# Altium PCB TSAL.PcbDoc
Units mil, origin at the board's own origin, x right, y up, seen from the top; angles counter-clockwise.
Board outline 3650 x 890 mil, 2 copper layers (Top Layer, Bottom Layer), stack 61.8 mil thick; 105 components, 90 nets, 222 pads, 19 vias.
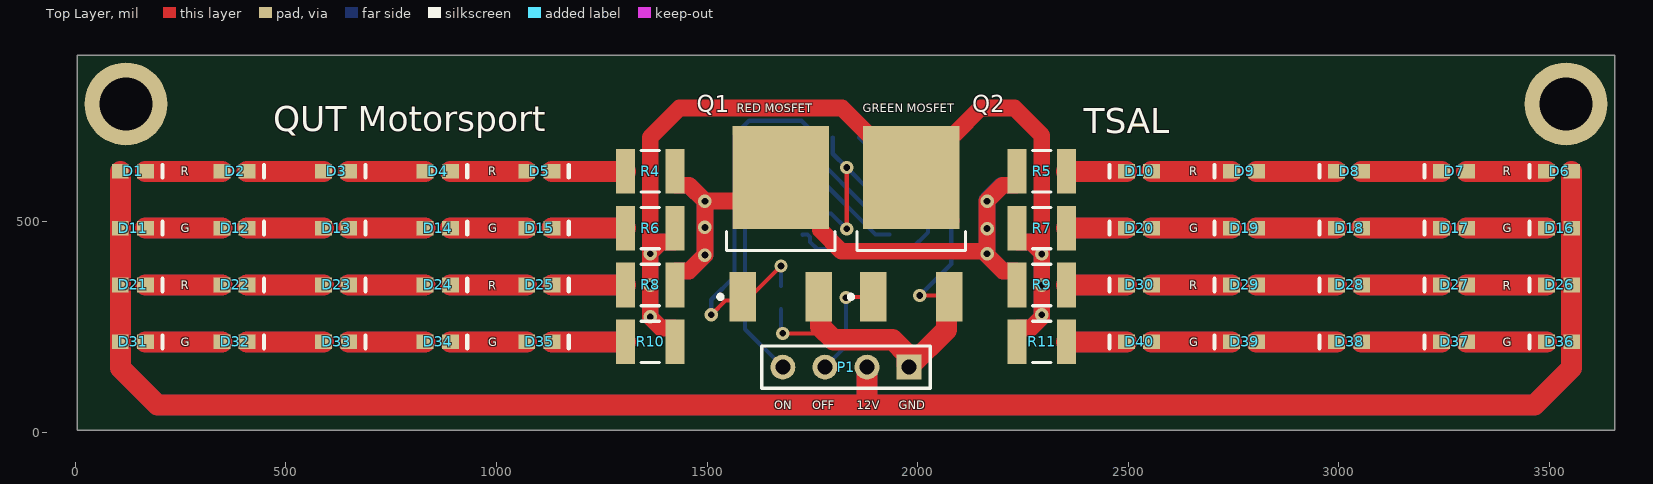
[diagram p0: Top Layer view]
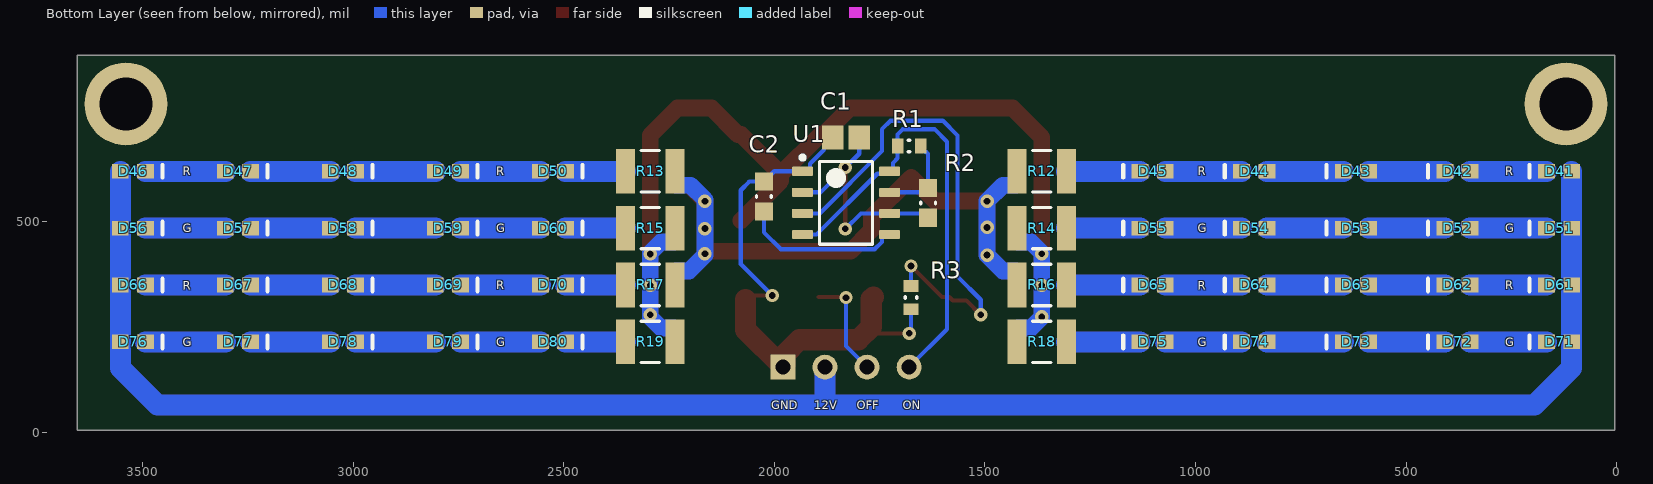
[diagram p1: Bottom Layer view, seen from below]

## Layer stack, top to bottom
Top Solder: solder mask 0.4, Solder Resist, Dk 3.5
Top Layer: signal copper 1.4
Dielectric 1: core 59, Core-043, Dk 4.3
Bottom Layer: signal copper 1.4
Bottom Solder: solder mask 0.4, Solder Resist, Dk 3.5

## Board outline
5,5 3655,5 3655,895 5,895

## Design rules (kind name [scope] priority, off if disabled: settings)
Clearance [All] p1: gap=10 ignorepadtopadclearanceinfootprint=FALSE except(0: Arc-Hole Track-Hole SMDPad-Hole THPad-Hole Via-Hole Fill-Hole Poly-Hole Region-Hole Text-Hole)
PolygonConnect [All] p1: connectstyle=Relief reliefconductorwidth=10 reliefentries=4 polygonreliefangle="90 Angle" airgapwidth=10
RoutingVias [All] p1: holewidth=15.75 width=31.5 viastyle="Through Hole" minholewidth=15.75 minwidth=31.5 maxholewidth=15.75 maxwidth=31.5
SolderMaskExpansion [All] p1: expansion=4 istentingtop=FALSE
Width [All] p1: maxlimit=50 minlimit=10 preferedwidth=10 minimp=50.000000 maximp=50.000000 favimp=50.000000
30 further rules are at their usual default settings.

## Classes and differential pairs
component class LEDs: D1 D2 D3 D4 D5 D6 D7 D8 D9 D10 D11 D12 D13 D14 D15 D16 D17 D18 D19 D20 D21 D22 D23 D24 D25 D26 D27 D28 D29 D30 D31 D32 D33 D34 D35 D36 D37 D38 D39 D40 D41 D42 D43 D44 D45 D46 D47 D48 D49 D50 D51 D52 D53 D54 D55 D56 D57 D58 D59 D60 D61 D62 D63 D64 D65 D66 D67 D68 D69 D70 D71 D72 D73 D74 D75 D76 D77 D78 D79 D80 R4 R5 R6 R7 R8 R9 R10 R11 R12 R13 R14 R15 R16 R17 R18 R19
component class Control: C1 C2 P1 Q1 Q2 R1 R2 R3 U1

## Components (designator, comment, footprint, x,y, rotation, side; value= is the part's Value field where it differs from the comment)
C1 "C0805C475M3PACTU" CAPC2013X145X50NL20T25 1830,700 r180 bottom
C2 "CAP 10nF 25V 0603(1608)" CAPC0603(1608)100_M 2025,560 r270 bottom value=10nF
D1 "Red LED" LED-0603 136.65,620 r0 top
D2 "Red LED" LED-0603 377.92,620 r0 top
D3 "Red LED" LED-0603 619.19,620 r0 top
D4 "Red LED" LED-0603 860.46,620 r0 top
D5 "Red LED" LED-0603 1101.73,620 r0 top
D6 "Red LED" LED-0603 3523.35,620 r180 top
D7 "Red LED" LED-0603 3273.98,620 r180 top
D8 "Red LED" LED-0603 3024.61,620 r180 top
D9 "Red LED" LED-0603 2775.24,620 r180 top
D10 "Red LED" LED-0603 2525.87,620 r180 top
D11 "Green LED" LED-0603 136.65,485 r0 top
D12 "Green LED" LED-0603 377.92,485 r0 top
D13 "Green LED" LED-0603 619.19,485 r0 top
D14 "Green LED" LED-0603 860.46,485 r0 top
D15 "Green LED" LED-0603 1101.73,485 r0 top
D16 "Green LED" LED-0603 3523.35,485 r180 top
D17 "Green LED" LED-0603 3273.98,485 r180 top
D18 "Green LED" LED-0603 3024.61,485 r180 top
D19 "Green LED" LED-0603 2775.24,485 r180 top
D20 "Green LED" LED-0603 2525.87,485 r180 top
D21 "Red LED" LED-0603 136.65,350 r0 top
D22 "Red LED" LED-0603 377.92,350 r0 top
D23 "Red LED" LED-0603 619.19,350 r0 top
D24 "Red LED" LED-0603 860.46,350 r0 top
D25 "Red LED" LED-0603 1101.73,350 r0 top
D26 "Red LED" LED-0603 3523.35,350 r180 top
D27 "Red LED" LED-0603 3273.98,350 r180 top
D28 "Red LED" LED-0603 3024.61,350 r180 top
D29 "Red LED" LED-0603 2775.24,350 r180 top
D30 "Red LED" LED-0603 2525.87,350 r180 top
D31 "Green LED" LED-0603 136.65,215 r0 top
D32 "Green LED" LED-0603 377.92,215 r0 top
D33 "Green LED" LED-0603 619.19,215 r0 top
D34 "Green LED" LED-0603 860.46,215 r0 top
D35 "Green LED" LED-0603 1101.73,215 r0 top
D36 "Green LED" LED-0603 3523.35,215 r180 top
D37 "Green LED" LED-0603 3273.98,215 r180 top
D38 "Green LED" LED-0603 3024.61,215 r180 top
D39 "Green LED" LED-0603 2775.24,215 r180 top
D40 "Green LED" LED-0603 2525.87,215 r180 top
D41 "Red LED" LED-0603 136.65,620 r0 bottom
D42 "Red LED" LED-0603 377.92,620 r0 bottom
D43 "Red LED" LED-0603 619.19,620 r0 bottom
D44 "Red LED" LED-0603 860.46,620 r0 bottom
D45 "Red LED" LED-0603 1101.73,620 r0 bottom
D46 "Red LED" LED-0603 3523.35,620 r180 bottom
D47 "Red LED" LED-0603 3273.98,620 r180 bottom
D48 "Red LED" LED-0603 3024.61,620 r180 bottom
D49 "Red LED" LED-0603 2775.24,620 r180 bottom
D50 "Red LED" LED-0603 2525.87,620 r180 bottom
D51 "Green LED" LED-0603 136.65,485 r0 bottom
D52 "Green LED" LED-0603 377.92,485 r0 bottom
D53 "Green LED" LED-0603 619.19,485 r0 bottom
D54 "Green LED" LED-0603 860.46,485 r0 bottom
D55 "Green LED" LED-0603 1101.73,485 r0 bottom
D56 "Green LED" LED-0603 3523.35,485 r180 bottom
D57 "Green LED" LED-0603 3273.98,485 r180 bottom
D58 "Green LED" LED-0603 3024.61,485 r180 bottom
D59 "Green LED" LED-0603 2775.24,485 r180 bottom
D60 "Green LED" LED-0603 2525.87,485 r180 bottom
D61 "Red LED" LED-0603 136.65,350 r0 bottom
D62 "Red LED" LED-0603 377.92,350 r0 bottom
D63 "Red LED" LED-0603 619.19,350 r0 bottom
D64 "Red LED" LED-0603 860.46,350 r0 bottom
D65 "Red LED" LED-0603 1101.73,350 r0 bottom
D66 "Red LED" LED-0603 3523.35,350 r180 bottom
D67 "Red LED" LED-0603 3273.98,350 r180 bottom
D68 "Red LED" LED-0603 3024.61,350 r180 bottom
D69 "Red LED" LED-0603 2775.24,350 r180 bottom
D70 "Red LED" LED-0603 2525.87,350 r180 bottom
D71 "Green LED" LED-0603 136.65,215 r0 bottom
D72 "Green LED" LED-0603 377.92,215 r0 bottom
D73 "Green LED" LED-0603 619.19,215 r0 bottom
D74 "Green LED" LED-0603 860.46,215 r0 bottom
D75 "Green LED" LED-0603 1101.73,215 r0 bottom
D76 "Green LED" LED-0603 3523.35,215 r180 bottom
D77 "Green LED" LED-0603 3273.98,215 r180 bottom
D78 "Green LED" LED-0603 3024.61,215 r180 bottom
D79 "Green LED" LED-0603 2775.24,215 r180 bottom
D80 "Green LED" LED-0603 2525.87,215 r180 bottom
P1 "Header 4" HDR1X4 1980,155 r180 top
Q1 "NTD4860NT4G" ONSC-DPAK-3-369AA-01_V 1675,495 r90 top
Q2 "NTD4860NT4G" ONSC-DPAK-3-369AA-01_V 1985,495 r90 top
R1 "1K 5% 0603(1608)" RESC0603(1608)_L 1680,680 r0 bottom value="1000.00 Ohm"
R2 "51K 5% 0603(1608)" RESC0603(1608)_M 1635,545 r90 bottom value="51000.00 Ohm"
R3 "1K 5% 0603(1608)" RESC0603(1608)_L 1675.58,320 r90 bottom value="1000.00 Ohm"
R4 "100R 5% 1210(3225)" RESC1210(3225)_N 1365,620 r180 top value="100.00 Ohm"
R5 "100R 5% 1210(3225)" RESC1210(3225)_N 2295,620 r0 top value="100.00 Ohm"
R6 "75R 5% 1210(3225)" RESC1210(3225)_N 1365,485 r180 top value="75.00 Ohm"
R7 "75R 5% 1210(3225)" RESC1210(3225)_N 2295,485 r0 top value="75.00 Ohm"
R8 "100R 5% 1210(3225)" RESC1210(3225)_N 1365,350 r180 top value="100.00 Ohm"
R9 "100R 5% 1210(3225)" RESC1210(3225)_N 2295,350 r0 top value="100.00 Ohm"
R10 "75R 5% 1210(3225)" RESC1210(3225)_N 1365,215 r180 top value="75.00 Ohm"
R11 "75R 5% 1210(3225)" RESC1210(3225)_N 2295,215 r0 top value="75.00 Ohm"
R12 "100R 5% 1210(3225)" RESC1210(3225)_N 1365,620 r180 bottom value="100.00 Ohm"
R13 "100R 5% 1210(3225)" RESC1210(3225)_N 2295,620 r0 bottom value="100.00 Ohm"
R14 "75R 5% 1210(3225)" RESC1210(3225)_N 1365,485 r180 bottom value="75.00 Ohm"
R15 "75R 5% 1210(3225)" RESC1210(3225)_N 2295,485 r0 bottom value="75.00 Ohm"
R16 "100R 5% 1210(3225)" RESC1210(3225)_N 1365,350 r180 bottom value="100.00 Ohm"
R17 "100R 5% 1210(3225)" RESC1210(3225)_N 2295,350 r0 bottom value="100.00 Ohm"
R18 "75R 5% 1210(3225)" RESC1210(3225)_N 1365,215 r180 bottom value="75.00 Ohm"
R19 "75R 5% 1210(3225)" RESC1210(3225)_N 2295,215 r0 bottom value="75.00 Ohm"
U1 "LMC555CM/NOPB" D0008A_L 1830,545 r180 bottom

## Footprints (in the part's own frame and the unit in brackets; to place one, negate y for a bottom-side part, rotate by r counter-clockwise, add the part's x,y. Pads: shape width x height; smd on the part's side, far side on the other; paste and mask are expansions set on the pad)
CAPC0603(1608)100_M [mm] "Chip Capacitor, Body 1.6x0.8mm, Height 1.0mm, IPC Low Density"
  rect 1.1x1.1 smd: 1(-0.9,0) 2(0.9,0)
  silkscreen extent -0.05,-0.45 0.05,0.45, body extent -0.87,-0.47 0.88,0.48, height 1
CAPC2013X145X50NL20T25 [mm] "Chip Capacitor, 2-Leads, Body 2.00x1.25mm, IPC Medium Density"
  rect 1.3x1.45 smd: 1(-0.8,0) 2(0.8,0)
  body extent -1.1,-0.72 1.1,0.72, height 1.45
D0008A_L [mm] "SOIC, 8-Leads, Body 5x4mm, Pitch 1.27mm, IPC High Density"
  rrect18% 1.25x0.55 smd: 1(-2.625,1.905) 2(-2.625,0.635) 3(-2.625,-0.635) 4(-2.625,-1.905) 5(2.625,-1.905) 6(2.625,-0.635) 7(2.625,0.635) 8(2.625,1.905)
  silkscreen extent -2.75,-2.5 1.6,2.85, body extent -3,-2.45 3,2.45, height 1.63
HDR1X4 [mm] "Connector; Header; 4 Position"
  rect 1.5x1.5 hole 0.9: 1(0,0)
  round 1.5 hole 0.9: 2(2.54,0) 3(5.08,0) 4(7.62,0)
  silkscreen extent -1.27,-1.27 8.89,1.27
LED-0603 [mil]
  rect 40x35 smd: 1(-30,0) 2(30,0)
  silkscreen extent 70,-15 70,15, body extent -45,-18 45,18, height 20
ONSC-DPAK-3-369AA-01_V [mm] "DPAK, 3-Leads, Body 6.54x6.095mm, Pitch 2.29mm"
  rect 3x1.6 smd: 1(-4.4,2.29) 3(-4.4,-2.29)
  rect 6.2x5.8 smd: 4(2.8,0)
  silkscreen extent -4.52,-3.27 -0.45,3.76, body extent -1.6,-3.27 4.49,3.27, height 2.47
RESC0603(1608)_L [mm] "Chip Resistor, Body 1.6x0.8mm, IPC High Density"
  rect 0.7x0.9 smd: 1(-0.7,0) 2(0.7,0)
  silkscreen extent -0.05,-0.35 0.05,0.35, body extent -0.85,-0.47 0.85,0.47, height 0.6
RESC0603(1608)_M [mm] "Chip Resistor, Body 1.6x0.8mm, IPC Low Density"
  rect 1.1x1.1 smd: 1(-0.9,0) 2(0.9,0)
  silkscreen extent -0.05,-0.45 0.05,0.45, body extent -0.85,-0.47 0.85,0.47, height 0.6
RESC1210(3225)_N [mm] "Chip Resistor, Body 3.2x2.5mm, IPC Medium Density"
  rect 1.15x2.7 smd: 1(-1.5,0) 2(1.5,0)
  silkscreen extent -0.55,-1.25 0.55,1.25, body extent -1.7,-1.35 1.7,1.35, height 0.71

## Part data
C1: library part CMP-2007-01014-1, Manufacturer=Kemet, Part Number=C0805C475M3PACTU
C2: library part CMP-1035-02316-1, "CAP 10nF 25V ±5% 0603 (1608 Metric) Thickness 1mm SMD", Case-EIA=0603, Case-Metric=1608, Rated Voltage="25 V", Tolerance=Â±5%, Max Thickness="1 mm", Technology=SMT
D1 D2 D3 D4 D5 D6 D7 D8 D9 D10 D21 D22 D23 D24 D25 D26 D27 D28 D29 D30 D41 D42 D43 D44 D45 D46 D47 D48 D49 D50 D61 D62 D63 D64 D65 D66 D67 D68 D69 D70: library part LEDRed
D11 D12 D13 D14 D15 D16 D17 D18 D19 D20 D31 D32 D33 D34 D35 D36 D37 D38 D39 D40 D51 D52 D53 D54 D55 D56 D57 D58 D59 D60 D71 D72 D73 D74 D75 D76 D77 D78 D79 D80: library part LEDGreen
P1: "Header, 4-Pin", LatestRevisionDate=17-Jul-2002, LatestRevisionNote="Re-released for DXP Platform.", Publisher="Altium Limited"
Q1 Q2: library part CMP-1058-00321-1, "Power MOSFET, 25 V, 65 A, Single N-Channel, 3-Pin DPAK, Pb-Free, Tape and Reel", Manufacturer="On Semiconductor", Package Type=DPAK-3, Channel Polarity="N Channel", Ciss Typ (pF)=1308, ComponentLink1Description="Manufacturer URL", ComponentLink1URL=http://www.onsemi.com/, ComponentLink2Description=Datasheet, ComponentLink2URL=http://www.onsemi.cn/pub_link/Collateral/NTD4860N.PDF, ComponentLink3Description="Package Specification", ComponentLink3URL=http://www.onsemi.cn/pub_link/Collateral/369AA.PDF, Configuration=Single, Coss Typ (pF)=342, Crss Typ (pF)=169, DatasheetVersion="Rev. 1", ID Max (A)=65, Mounting Technology="Surface Mount", PackageDescription="3-Pin Flange Mount, Body 6.54 x 6.095 mm, Pitch 2.29 mm", PackageReference=DPAK-3-369AA-01, PackageVersion="Rev. B, 06/2010", Packing="Tape and Reel", PartNumber=NTD4860NT4G, Qrr Typ (nC)=3.5, RoHS=Pb-Free, V(BR)DSS Min (V)=25, VGS(th) Max (V)=2.5, VGS Max (V)=20
R1 R3: library part CMP-1012-00074-1, "1K 0.1W 5% 0603 (1608 Metric)  SMD", Case-EIA=0603, Case-Metric=1608, Power="0.1 W", Tolerance="5 %", Technology=SMT
R2: library part CMP-1012-00115-1, "51K 0.1W 5% 0603 (1608 Metric)  SMD", Case-EIA=0603, Case-Metric=1608, Power="0.1 W", Tolerance="5 %", Technology=SMT
R4 R5 R8 R9 R12 R13 R16 R17: library part CMP-1015-00050-1, "100R 0.5W 5% 1210 (3225 Metric)  SMD", Case-EIA=1210, Case-Metric=3225, Power="0.5 W", Tolerance="5 %", Technology=SMT
R6 R7 R10 R11 R14 R15 R18 R19: library part CMP-1015-00047-1, "75R 0.5W 5% 1210 (3225 Metric)  SMD", Case-EIA=1210, Case-Metric=3225, Power="0.5 W", Tolerance="5 %", Technology=SMT
U1: library part CMP-0056-00124-3, "CMOS Timer, 8-pin Narrow SOIC, Pb-Free", Manufacturer="Texas Instruments", PackageTopMarking=NSZXTT*LMC*555CM, PowerWise=N, Code_IPC=SOIC127P600-8, Code_JEDEC=MS-012-AA, ComponentLink1Description="Datasheet URL", ComponentLink1URL=http://www.ti.com/general/docs/lit/getliterature.tsp?genericPartNumber=LMC555&fileType=pdf, CompType="Analog IC", PackageDescription="SOIC Narrow, 4.9 x 3.9 x 1.45mm, 8 Lead, 1.27mm Pitch", PackageReference=D0008A, PinCount=8, RoHS=Y

## Free pads (board coordinates)
  round 196.85 hole 125.98 unplated: M3(120,780) M3(3540,780)

## Via types
v1: diameter 32, hole 16, Top Layer to Bottom Layer, 12 vias
v2: diameter 31.5, hole 15.75, Top Layer to Bottom Layer, 7 vias

## Nets (pads, with @x,y where several pads share a name; then routed paths per layer and width w, separated by ;. In a path a pad name is that pad's centre, name@x,y a point inside that pad or via, vN(x,y) a via of type N, cw(c..) or ccw(c..) an arc to the next point about the centre after c; other vN are vias at no path point)
+12: D1.1 D6.1 D11.1 D16.1 D21.1 D26.1 D31.1 D36.1 D41.1 D46.1 D51.1 D56.1 D61.1 D66.1 D71.1 D76.1 P1.2 | length 9086.4
  Top Layer w50: D1.1 D11.1 D21.1 D31.1 106.65,153.35 195,65 1880,65 ; P1.2 1880,80 1880,65 ; D6.1 D16.1 D26.1 D36.1 3553.35,153.35 3465,65 1880,65
  Bottom Layer w50: D41.1 D51.1 D61.1 D71.1 106.65,153.35 195,65 1880,65 ; P1.2 1880,65 ; D46.1 D56.1 D66.1 D76.1 3553.35,153.35 3465,65 1880,65
GND: C1.1 C2.1 P1.1 Q1.3 Q2.3 R3.1 U1.1 | length 1321.1
  Top Layer w10: v2(1680,235) 1755,235 1770,250 ; v2(2005,325) 2058.94,325 Q2.3@2068.66,315.28
  Top Layer w50: Q1.3 1770,316.93 1770,250 1800,220 1940,220 1975.47,184.53 1975.47,159.53 P1.1 2068.66,243.66 Q2.3@2068.66,315.28
  Bottom Layer w10: R3.1 1675.58,239.42 v2(1680,235) ; C1.1 1882.09,679.41 1882.09,671.26 1915.59,637.75 1915.59,625.83 1921.42,620 U1.1 2000.43,620 C2.1 2059.57,595.43 2080,575 2080,400 v2(2005,325)
GREEN_LEDS: Q2.4 R6.1 R7.1 R10.1 R11.1 R14.1 R15.1 R18.1 R19.1 | length 3236.6
  Top Layer w40: R10.1 1424.06,245.51 1421.42,248.15 1390.91,248.15 v1(1365,274.09) v1@1365,425.94 ; R6.1 1424.06,454.49 1421.42,451.85 1390.91,451.85 v1@1365,425.94 ; Q2.4@2079.17,503.19 1985,597.36 Q2.4 Q2.4@1985,613.11 ; R11.1 2235.94,245.51 2238.58,248.15 2269.09,248.15 2295,274.06 v1@2295,425.94 ; R7.1 2235.94,454.49 2238.58,451.85 2269.09,451.85 v1@2295,425.94 ; v1@1365,425.94 1365,700 1435,770 1820.24,770 1882.95,707.28 1890.83,707.28 Q2.4@1985,613.11 ; Q2.4@1985,613.11 2079.17,707.28 2087.05,707.28 2149.76,770 2230,770 2295,705 v1@2295,425.94
  Bottom Layer w40: R18.1 1424.06,245.51 1421.42,248.15 1390.91,248.15 v1(1365,274.09) 1365,425.94 1390.91,451.85 1421.42,451.85 1424.06,454.49 R14.1 ; R19.1 2235.94,245.51 2238.58,248.15 2269.09,248.15 2295,274.06 2295,425.94 2269.09,451.85 2238.58,451.85 2235.94,454.49 R15.1
  other v1: 2295,279.09 1365,349.09 2295,349.09 1365,424.09 2295,423.58
HV_ACTIVE: P1.4 R1.2 U1.4 U1.8 | length 1072.9
  Bottom Layer w10: P1.4 1590,245 1590,690 1620,720 1695,720 1707.56,707.44 R1.2 1707.56,651.02 1718.61,639.97 1718.61,625.83 1724.44,620 U1.8 1740.43,620 1746.26,614.17 1755.83,614.17 1900,470 U1.4
HV_INACTIVE: P1.3 Q2.1 | length 251.3
  Top Layer w10: v2(1830,320) 1831.77,321.77 Q2.1
  Bottom Layer w10: P1.3 1830,205 v2(1830,320)
NetC1_2: C1.2 R2.1 U1.2 U1.6 | length 581.3
  Top Layer w10: v2(1831.77,483.15) v2(1831.77,629.06)
  Bottom Layer w10: R2.1 1645.43,520 U1.6 1794.09,520 v2(1831.77,483.15) ; C1.2 1798.5,661.5 v2(1831.77,629.06) 1890.83,570 U1.2 U1.2@1939.17,564.17
NetC2_2: C2.2 U1.5 | length 387
  Bottom Layer w10: U1.5@1727.4,469.25 U1.5 1738.58,470 1744.41,464.17 1744.41,452.25 1761.65,435 1985,435 2025,475 C2.2
NetD1_2: D1.2 D2.1 | length 181.3
  Top Layer w50: D1.2 D2.1
NetD2_2: D2.2 D3.1 | length 181.3
  Top Layer w50: D2.2 D3.1
NetD3_2: D3.2 D4.1 | length 181.3
  Top Layer w50: D3.2 D4.1
NetD4_2: D4.2 D5.1 | length 181.3
  Top Layer w50: D4.2 D5.1
NetD5_2: D5.2 R4.2 | length 174.2
  Top Layer w50: D5.2 R4.2
NetD6_2: D6.2 D7.1 | length 189.4
  Top Layer w50: D7.1 D6.2
NetD7_2: D7.2 D8.1 | length 189.4
  Top Layer w50: D8.1 D7.2
NetD8_2: D8.2 D9.1 | length 189.4
  Top Layer w50: D9.1 D8.2
NetD9_2: D9.2 D10.1 | length 189.4
  Top Layer w50: D10.1 D9.2
NetD10_2: D10.2 R5.2 | length 141.8
  Top Layer w50: R5.2 D10.2
NetD11_2: D11.2 D12.1 | length 181.3
  Top Layer w50: D11.2 D12.1
NetD12_2: D12.2 D13.1 | length 181.3
  Top Layer w50: D12.2 D13.1
NetD13_2: D13.2 D14.1 | length 181.3
  Top Layer w50: D13.2 D14.1
NetD14_2: D14.2 D15.1 | length 181.3
  Top Layer w50: D14.2 D15.1
NetD15_2: D15.2 R6.2 | length 174.2
  Top Layer w50: D15.2 R6.2
NetD16_2: D16.2 D17.1 | length 189.4
  Top Layer w50: D17.1 D16.2
NetD17_2: D17.2 D18.1 | length 189.4
  Top Layer w50: D18.1 D17.2
NetD18_2: D18.2 D19.1 | length 189.4
  Top Layer w50: D19.1 D18.2
NetD19_2: D19.2 D20.1 | length 189.4
  Top Layer w50: D20.1 D19.2
NetD20_2: D20.2 R7.2 | length 141.8
  Top Layer w50: R7.2 D20.2
NetD21_2: D21.2 D22.1 | length 181.3
  Top Layer w50: D21.2 D22.1
NetD22_2: D22.2 D23.1 | length 181.3
  Top Layer w50: D22.2 D23.1
NetD23_2: D23.2 D24.1 | length 181.3
  Top Layer w50: D23.2 D24.1
NetD24_2: D24.2 D25.1 | length 181.3
  Top Layer w50: D24.2 D25.1
NetD25_2: D25.2 R8.2 | length 174.2
  Top Layer w50: D25.2 R8.2
NetD26_2: D26.2 D27.1 | length 189.4
  Top Layer w50: D27.1 D26.2
NetD27_2: D27.2 D28.1 | length 189.4
  Top Layer w50: D28.1 D27.2
NetD28_2: D28.2 D29.1 | length 189.4
  Top Layer w50: D29.1 D28.2
NetD29_2: D29.2 D30.1 | length 189.4
  Top Layer w50: D30.1 D29.2
NetD30_2: D30.2 R9.2 | length 141.8
  Top Layer w50: R9.2 D30.2
NetD31_2: D31.2 D32.1 | length 181.3
  Top Layer w50: D31.2 D32.1
NetD32_2: D32.2 D33.1 | length 181.3
  Top Layer w50: D32.2 D33.1
NetD33_2: D33.2 D34.1 | length 181.3
  Top Layer w50: D33.2 D34.1
NetD34_2: D34.2 D35.1 | length 181.3
  Top Layer w50: D34.2 D35.1
NetD35_2: D35.2 R10.2 | length 174.2
  Top Layer w50: D35.2 R10.2
NetD36_2: D36.2 D37.1 | length 189.4
  Top Layer w50: D37.1 D36.2
NetD37_2: D37.2 D38.1 | length 189.4
  Top Layer w50: D38.1 D37.2
NetD38_2: D38.2 D39.1 | length 189.4
  Top Layer w50: D39.1 D38.2
NetD39_2: D39.2 D40.1 | length 189.4
  Top Layer w50: D40.1 D39.2
NetD40_2: D40.2 R11.2 | length 141.8
  Top Layer w50: R11.2 D40.2
NetD41_2: D41.2 D42.1 | length 181.3
  Bottom Layer w50: D41.2 D42.1
NetD42_2: D42.2 D43.1 | length 181.3
  Bottom Layer w50: D42.2 D43.1
NetD43_2: D43.2 D44.1 | length 181.3
  Bottom Layer w50: D43.2 D44.1
NetD44_2: D44.2 D45.1 | length 181.3
  Bottom Layer w50: D44.2 D45.1
NetD45_2: D45.2 R12.2 | length 174.2
  Bottom Layer w50: D45.2 R12.2
NetD46_2: D46.2 D47.1 | length 189.4
  Bottom Layer w50: D47.1 D46.2
NetD47_2: D47.2 D48.1 | length 189.4
  Bottom Layer w50: D48.1 D47.2
NetD48_2: D48.2 D49.1 | length 189.4
  Bottom Layer w50: D49.1 D48.2
NetD49_2: D49.2 D50.1 | length 189.4
  Bottom Layer w50: D50.1 D49.2
NetD50_2: D50.2 R13.2 | length 141.8
  Bottom Layer w50: R13.2 D50.2
NetD51_2: D51.2 D52.1 | length 181.3
  Bottom Layer w50: D51.2 D52.1
NetD52_2: D52.2 D53.1 | length 181.3
  Bottom Layer w50: D52.2 D53.1
NetD53_2: D53.2 D54.1 | length 181.3
  Bottom Layer w50: D53.2 D54.1
NetD54_2: D54.2 D55.1 | length 181.3
  Bottom Layer w50: D54.2 D55.1
NetD55_2: D55.2 R14.2 | length 174.2
  Bottom Layer w50: D55.2 R14.2
NetD56_2: D56.2 D57.1 | length 189.4
  Bottom Layer w50: D57.1 D56.2
NetD57_2: D57.2 D58.1 | length 189.4
  Bottom Layer w50: D58.1 D57.2
NetD58_2: D58.2 D59.1 | length 189.4
  Bottom Layer w50: D59.1 D58.2
NetD59_2: D59.2 D60.1 | length 189.4
  Bottom Layer w50: D60.1 D59.2
NetD60_2: D60.2 R15.2 | length 141.8
  Bottom Layer w50: R15.2 D60.2
NetD61_2: D61.2 D62.1 | length 181.3
  Bottom Layer w50: D61.2 D62.1
NetD62_2: D62.2 D63.1 | length 181.3
  Bottom Layer w50: D62.2 D63.1
NetD63_2: D63.2 D64.1 | length 181.3
  Bottom Layer w50: D63.2 D64.1
NetD64_2: D64.2 D65.1 | length 181.3
  Bottom Layer w50: D64.2 D65.1
NetD65_2: D65.2 R16.2 | length 174.2
  Bottom Layer w50: D65.2 R16.2
NetD66_2: D66.2 D67.1 | length 189.4
  Bottom Layer w50: D67.1 D66.2
NetD67_2: D67.2 D68.1 | length 189.4
  Bottom Layer w50: D68.1 D67.2
NetD68_2: D68.2 D69.1 | length 189.4
  Bottom Layer w50: D69.1 D68.2
NetD69_2: D69.2 D70.1 | length 189.4
  Bottom Layer w50: D70.1 D69.2
NetD70_2: D70.2 R17.2 | length 141.8
  Bottom Layer w50: R17.2 D70.2
NetD71_2: D71.2 D72.1 | length 181.3
  Bottom Layer w50: D71.2 D72.1
NetD72_2: D72.2 D73.1 | length 181.3
  Bottom Layer w50: D72.2 D73.1
NetD73_2: D73.2 D74.1 | length 181.3
  Bottom Layer w50: D73.2 D74.1
NetD74_2: D74.2 D75.1 | length 181.3
  Bottom Layer w50: D74.2 D75.1
NetD75_2: D75.2 R18.2 | length 174.2
  Bottom Layer w50: D75.2 R18.2
NetD76_2: D76.2 D77.1 | length 189.4
  Bottom Layer w50: D77.1 D76.2
NetD77_2: D77.2 D78.1 | length 189.4
  Bottom Layer w50: D78.1 D77.2
NetD78_2: D78.2 D79.1 | length 189.4
  Bottom Layer w50: D79.1 D78.2
NetD79_2: D79.2 D80.1 | length 189.4
  Bottom Layer w50: D80.1 D79.2
NetD80_2: D80.2 R19.2 | length 141.8
  Bottom Layer w50: R19.2 D80.2
RED_LED_CONTROL: Q1.1 R3.2 U1.3 | length 1214.2
  Top Layer w10: v2(1510,279.09) 1544.2,313.3 1576.37,313.3 Q1.1 1602.35,321.77 v2(1675.58,395)
  Bottom Layer w10: v2(1510,279.09) 1510,315 1565,370 1565,705 1600,740 1724.41,740 1744.41,720 1744.41,667.88 1892.28,520 U1.3 ; R3.2 v2(1675.58,395)
RED_LED_SPLIT: R1.1 R2.2 U1.7 | length 204.4
  Bottom Layer w10: R1.1 1652.44,676.06 1643.66,667.28 1640.86,667.28 1635,661.43 R2.2 1645.43,570 U1.7
RED_LEDS: Q1.4 R4.1 R5.1 R8.1 R9.1 R12.1 R13.1 R16.1 R17.1 | length 2235.6
  Top Layer w40: R8.1 1424.06,380.51 1426.69,383.15 1457.2,383.15 v1(1495,420.94) v1(1495,486.54) v1(1495,549.09) ; R4.1 1424.06,589.49 1426.69,586.85 1457.2,586.85 v1(1495,549.09) ; v1@2165,420.94 2202.8,383.15 2233.31,383.15 2235.94,380.51 R9.1 ; R5.1 2235.94,589.49 2233.31,586.85 2201.85,586.85 2165,550 v1(2165,549.09) v1(2165,484.09) 2165,430 1819.4,430 1769.17,480.22 1769.17,511.06 Q1.4 1618.82,549.06 v1(1495,549.09)
  Bottom Layer w40: R16.1 1424.06,380.51 1426.69,383.15 1457.2,383.15 v1(1495,420.94) 1495,549.17 1457.32,586.85 1426.69,586.85 1424.06,589.49 R12.1 ; R17.1 2235.94,380.51 2233.31,383.15 2202.8,383.15 2165,420.94 2165,552.56 2199.29,586.85 2233.31,586.85 2235.94,589.49 R13.1
  other v1: 2165,424.09

## Silkscreen, mask and mechanical layers (free items; w line width, h text height)
Top Overlay:
  text "RED MOSFET" at 1570,760 h20
  text "GREEN MOSFET" at 1870,760 h20
  text "QUT Motorsport" at 470,715 h60
  text "TSAL" at 2395,710.01 h60
  text "R" at 250,610 h20
  text "R" at 980,610 h20
  text "R" at 2645,610 h20
  text "R" at 3390,610 h20
  text "G" at 250,475 h20
  text "G" at 980,475 h20
  text "G" at 2645,475 h20
  text "G" at 3390,475 h20
  text "R" at 250,340 h20
  text "R" at 2645,340 h20
  text "R" at 980,339.09 h20
  text "R" at 3390,339.09 h20
  text "G" at 250,205 h20
  text "G" at 980,205 h20
  text "G" at 2645,205 h20
  text "G" at 3390,205 h20
  text "ON" at 1660,55 h20
  text "OFF" at 1750,55 h20
  text "12V" at 1855,55 h20
  text "GND" at 1955,55 h20
Bottom Overlay:
  text "R" at 265,610 h20
  text "R" at 995,610 h20
  text "R" at 2660,610 h20
  text "R" at 3405,610 h20
  text "G" at 265,475 h20
  text "G" at 995,475 h20
  text "G" at 2660,475 h20
  text "G" at 3405,475 h20
  text "R" at 265,340 h20
  text "R" at 2660,340 h20
  text "R" at 995,339.09 h20
  text "R" at 3405,339.09 h20
  text "G" at 265,205 h20
  text "G" at 995,205 h20
  text "G" at 2660,205 h20
  text "G" at 3405,205 h20
  text "ON" at 1695,55 h20
  text "OFF" at 1805,55 h20
  text "12V" at 1905,55 h20
  text "GND" at 2007.28,55 h20
BoardOutline:
  the board outline again, w10

## Dimensions
3540,780 to 3655,895 on Dimensions
3655,5 to 3655,895 on Dimensions
5,895 to 3655,895 on Dimensions
120,780 to 3540,780 on Dimensions